# EAGLE board ArduinoUNO (EAGLE 7.6.0)

Size 73.58 x 88.79 mm. Coordinates in mm from the lower left corner, seen from the top.
Outline: 0,0 56.82,0 56.82,53.33 0,53.33 0,0
Copper layers (1*16): Top 0.035mm / dielectric 1.5mm / Bottom 0.035mm
Design rules "default": minimum track width 10mil, minimum drill 24mil, track to track 8mil, track to pad 8mil, pad to pad 8mil, via to via 8mil, smd to smd 8mil, copper to edge 40mil, drill to drill 8mil, minimum pad ring 10mil, minimum via ring 8mil, stop-mask expansion 4mil, vias tented up to drill 0mil, thermal gap 10mil

## Footprints (pad centres in the part's own frame; a part is rotated, then mirrored left to right if it is on the bottom)
LED5MM = drill 0.813 octagon: A -1.27,0; K 1.27,0
PHOTORESISTOR-2.54 = drill 1 pad 1.5: P$1 -1.27,0; P$2 1.27,0
0207/10 = drill 0.813 octagon: 1 -5.08,0; 2 5.08,0
ARDUINO_UNO = drill 1.016 pad 1.88: 0 63.5,50.8; 1 60.96,50.8; 2 58.42,50.8; 3 55.88,50.8; 3.3V 35.56,2.54; 4 53.34,50.8; 5 50.8,50.8; 5V 38.1,2.54; 6 48.26,50.8; 7 45.72,50.8; 8 41.656,50.8; 9 39.116,50.8; 10 36.576,50.8; 11 34.036,50.8; 12 31.496,50.8; 13 28.956,50.8; A0 50.8,2.54; A1 53.34,2.54; A2 55.88,2.54; A3 58.42,2.54; A4 60.96,2.54; A5 63.5,2.54; AREF 23.876,50.8; GND 26.416,50.8; GND. 43.18,2.54; GND.. 40.64,2.54; I/OREF 30.48,2.54; N/C 27.94,2.54; RESET 33.02,2.54; SCL 18.796,50.8; SDA 21.336,50.8; VIN 45.72,2.54 | hole 3.2: 66.04,7.62; 66.04,35.56; 15.24,50.8; 13.97,2.54

## Placement (x,y rotation side)
D2  [LED5MM]  5,289.48 0 top  (outside the outline)
D3  [LED5MM]  5,302.18 0 top  (outside the outline)
D4  [LED5MM]  5,314.88 0 top  (outside the outline)
D5  [LED5MM]  5,327.58 0 top  (outside the outline)
D6  [LED5MM]  5,340.28 0 top  (outside the outline)
D7  [LED5MM]  5,352.98 0 top  (outside the outline)
D8  [LED5MM]  5,365.68 0 top  (outside the outline)
R1  [PHOTORESISTOR-2.54]  5,10.08 0 top
R3  10k‎Ω  [0207/10]  5,22.78 0 top
R4  10k‎Ω  [0207/10]  5,48.18 0 top
R5  [PHOTORESISTOR-2.54]  5,60.88 0 top
R6  10k‎Ω  [0207/10]  5,73.58 0 top
R7  [PHOTORESISTOR-2.54]  5,86.28 0 top
R8  10k‎Ω  [0207/10]  5,98.98 0 top  (outside the outline)
R9  [PHOTORESISTOR-2.54]  5,111.68 0 top  (outside the outline)
R10  10k‎Ω  [0207/10]  5,124.38 0 top  (outside the outline)
R11  [PHOTORESISTOR-2.54]  5,137.08 0 top  (outside the outline)
R12  10k‎Ω  [0207/10]  5,149.78 0 top  (outside the outline)
R13  [PHOTORESISTOR-2.54]  5,162.48 0 top  (outside the outline)
R14  10k‎Ω  [0207/10]  5,175.18 0 top  (outside the outline)
R15  [PHOTORESISTOR-2.54]  5,187.88 0 top  (outside the outline)
R16  220‎Ω  [0207/10]  5,200.58 0 top  (outside the outline)
R17  220‎Ω  [0207/10]  5,213.28 0 top  (outside the outline)
R18  220‎Ω  [0207/10]  5,225.98 0 top  (outside the outline)
R19  220‎Ω  [0207/10]  5,238.68 0 top  (outside the outline)
R20  220‎Ω  [0207/10]  5,251.38 0 top  (outside the outline)
R21  220‎Ω  [0207/10]  5,264.08 0 top  (outside the outline)
R22  220‎Ω  [0207/10]  5,276.78 0 top  (outside the outline)
U1  [ARDUINO_UNO]  5,35.48 0 top

## Library data of the parts
D2-D8 R1 R3-R22 U1 = AUTODESK_CIRCUITS_BREADBOARD

## Nets
N$1: R1.P$1 R3.2 U1.A0
N$2: R3.1 R4.1 R6.1 R8.1 R10.1 R12.1 R14.1 R16.1 R17.1 R18.1 R19.1 R20.1 R21.1 R22.1 U1.GND.
N$3: R4.2 R5.P$1 U1.A1
N$4: R6.2 R7.P$1 U1.A2
N$5: R8.2 R9.P$1 U1.A3
N$6: R10.2 R11.P$1 U1.A4
N$7: R12.2 R13.P$1 U1.A5
N$8: R14.2 R15.P$1
N$9: R1.P$2 R5.P$2 R7.P$2 R9.P$2 R11.P$2 R13.P$2 R15.P$2 U1.5V
N$10: D2.K R16.2
N$11: D3.K R17.2
N$12: D4.K R18.2
N$13: D5.K R19.2
N$14: D6.K R20.2
N$15: D7.K R21.2
N$16: D8.K R22.2
N$17: D2.A U1.9
N$18: D3.A U1.8
N$19: D4.A U1.7
N$20: D5.A U1.6
N$21: D6.A U1.5
N$22: D7.A U1.4
N$23: D8.A

## Tracks (layer width: path | path; a pad name or v marks a point on that pad's centre or on a via)
N$1  (2 unrouted)
N$2  (14 unrouted)
N$3  (2 unrouted)
N$4  (2 unrouted)
N$5  (2 unrouted)
N$6  (2 unrouted)
N$7  (2 unrouted)
N$8  (1 unrouted)
N$9  (7 unrouted)
N$10  (1 unrouted)
N$11  (1 unrouted)
N$12  (1 unrouted)
N$13  (1 unrouted)
N$14  (1 unrouted)
N$15  (1 unrouted)
N$16  (1 unrouted)
N$17  (1 unrouted)
N$18  (1 unrouted)
N$19  (1 unrouted)
N$20  (1 unrouted)
N$21  (1 unrouted)
N$22  (1 unrouted)